# Altium PCB RF-BM-S02A-PACKAGE.PcbDoc
Units mil, origin at the board's own origin, x right, y up, seen from the top; angles counter-clockwise.
Board outline 6000 x 4000 mil, 2 copper layers (Top Layer, Bottom Layer); 1 components, 0 nets, 18 pads, 0 vias.
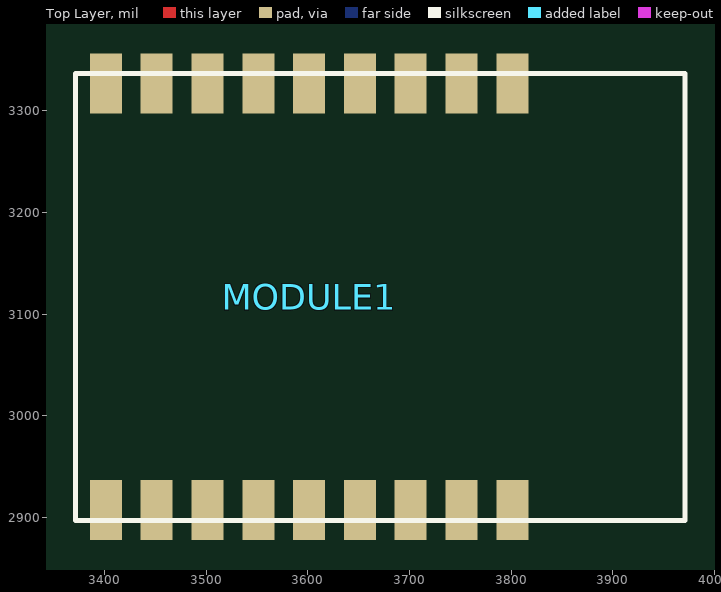
[diagram p0: Top Layer view]
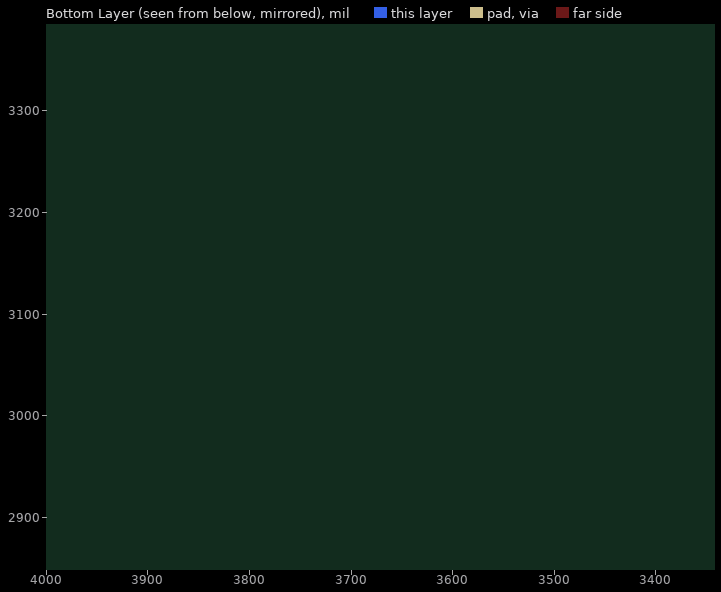
[diagram p1: Bottom Layer view, seen from below]

## Layer stack, top to bottom
Top Solder: solder mask 0.4, Solder Resist, Dk 3.5
Top Layer: signal copper 1.4
Dielectric 1: dielectric 12.6, FR-4, Dk 4.8
Bottom Layer: signal copper 1.4
Bottom Solder: solder mask 0.4, Solder Resist, Dk 3.5

## Board outline
1000,1000 7000,1000 7000,5000 1000,5000

## Design rules (kind name [scope] priority, off if disabled: settings)
Clearance [All] p1: gap=10
PolygonConnect [All] p1: connectstyle=Relief reliefconductorwidth=10 reliefentries=4 polygonreliefangle="90 Angle" airgapwidth=10
RoutingVias [All] p1: holewidth=28 width=50 viastyle="Through Hole" minholewidth=28 minwidth=50 maxholewidth=28 maxwidth=50
SolderMaskExpansion [All] p1: expansion=4
Width [All] p1: maxlimit=10 minlimit=10 preferedwidth=10
30 further rules are at their usual default settings.

## Components (designator, comment, footprint, x,y, rotation, side; value= is the part's Value field where it differs from the comment)
MODULE1 "RF-BM-S02" RF-BM-S02 3371.27,2896.97 r0 top

## Footprints (in the part's own frame and the unit in brackets; to place one, negate y for a bottom-side part, rotate by r counter-clockwise, add the part's x,y. Pads: shape width x height; smd on the part's side, far side on the other; paste and mask are expansions set on the pad)
RF-BM-S02 [mil]
  rect 31.5x59.06 smd: 1(430,430) 2(380,430) 3(330,430) 4(280,430) 5(230,430) 6(180,430) 7(130,430) 8(80,430) 9(30,430) 10(30,10) 11(80,10) 12(130,10) 13(180,10) 14(230,10) 15(280,10) 16(330,10) 17(380,10) 18(430,10)
  silkscreen extent 0,0 600,440

## Nets (pads, with @x,y where several pads share a name; then routed paths per layer and width w, separated by ;. In a path a pad name is that pad's centre, name@x,y a point inside that pad or via, vN(x,y) a via of type N, cw(c..) or ccw(c..) an arc to the next point about the centre after c; other vN are vias at no path point)
pads on no net: MODULE1.1 MODULE1.2 MODULE1.3 MODULE1.4 MODULE1.5 MODULE1.6 MODULE1.7 MODULE1.8 MODULE1.9 MODULE1.10 MODULE1.11 MODULE1.12 MODULE1.13 MODULE1.14 MODULE1.15 MODULE1.16 MODULE1.17 MODULE1.18